# Altium PCB SensorModulePCB.PcbDoc
Units mm, origin at the board's own origin, x right, y up, seen from the top; angles counter-clockwise.
Board outline 25 x 25 mm, 2 copper layers (Top Layer, Bottom Layer); 29 components, 18 nets, 76 pads, 42 vias.
Unrouted connection lines stored in the file: 58.
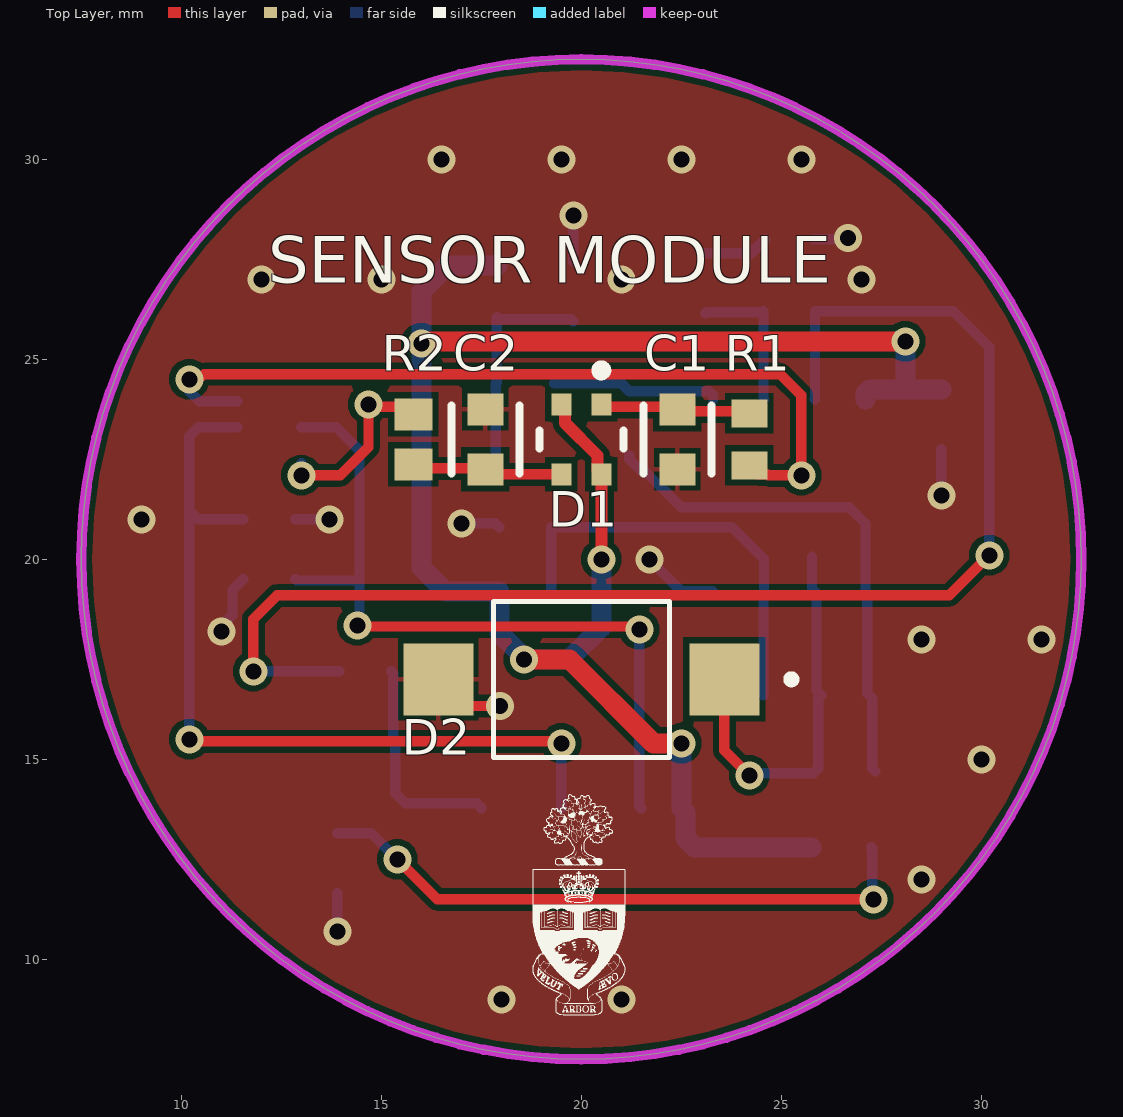
[diagram p0: Top Layer view]
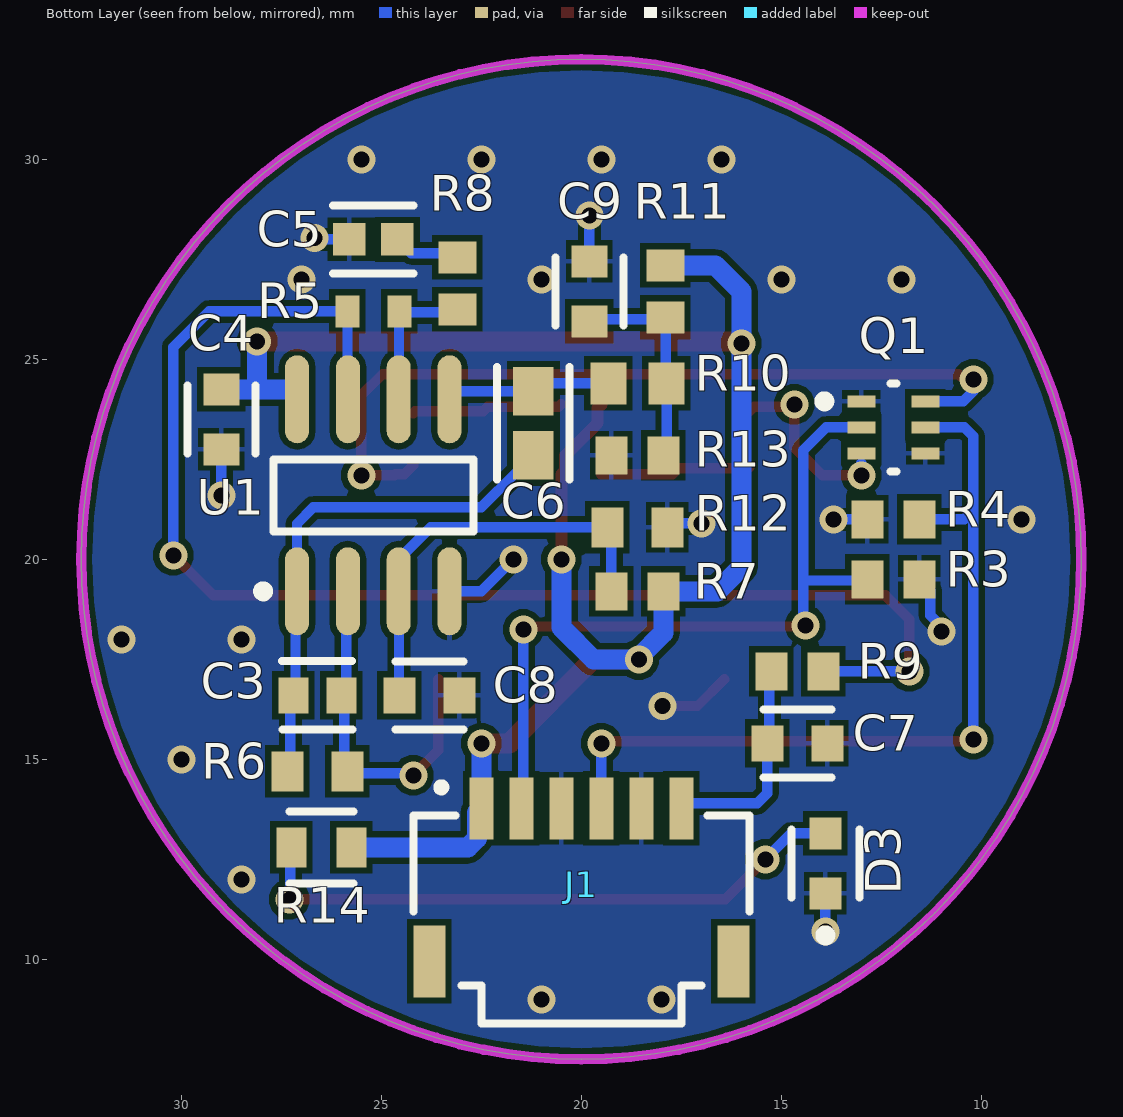
[diagram p1: Bottom Layer view, seen from below]
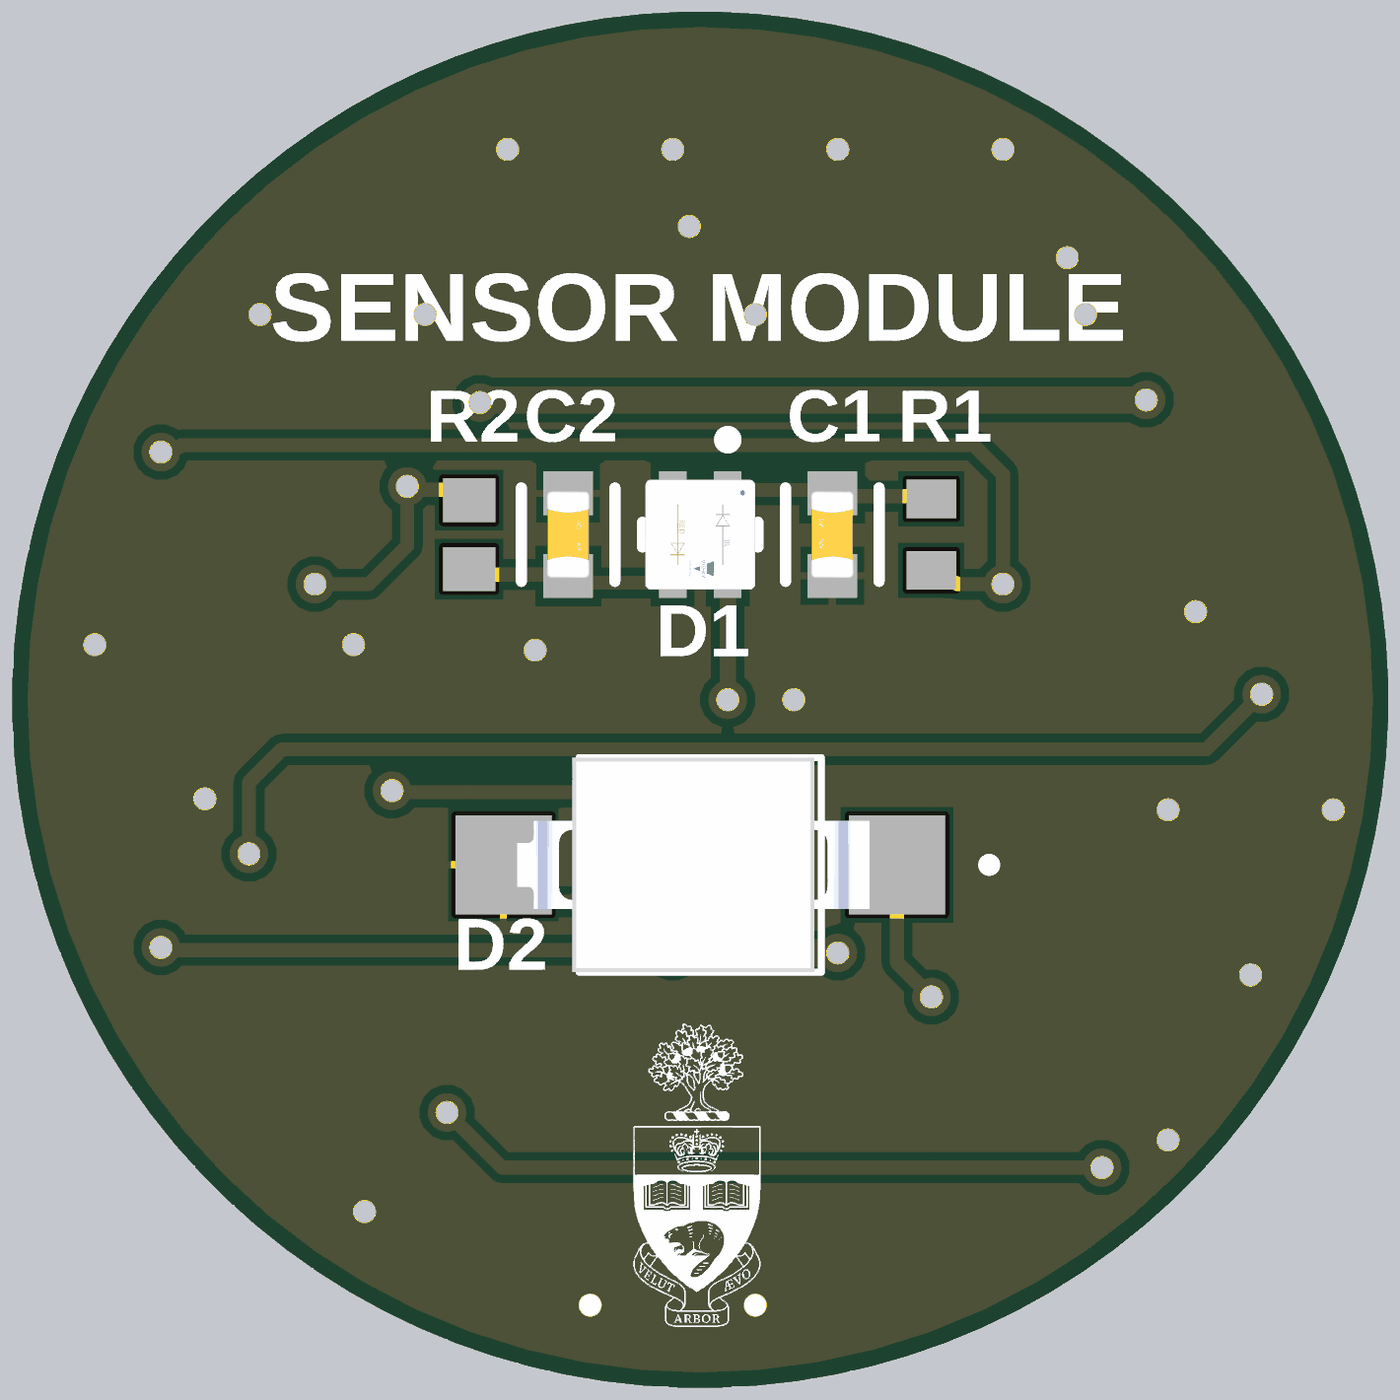
[diagram p2: 3D render of the assembled board from above, using the file's embedded part models]
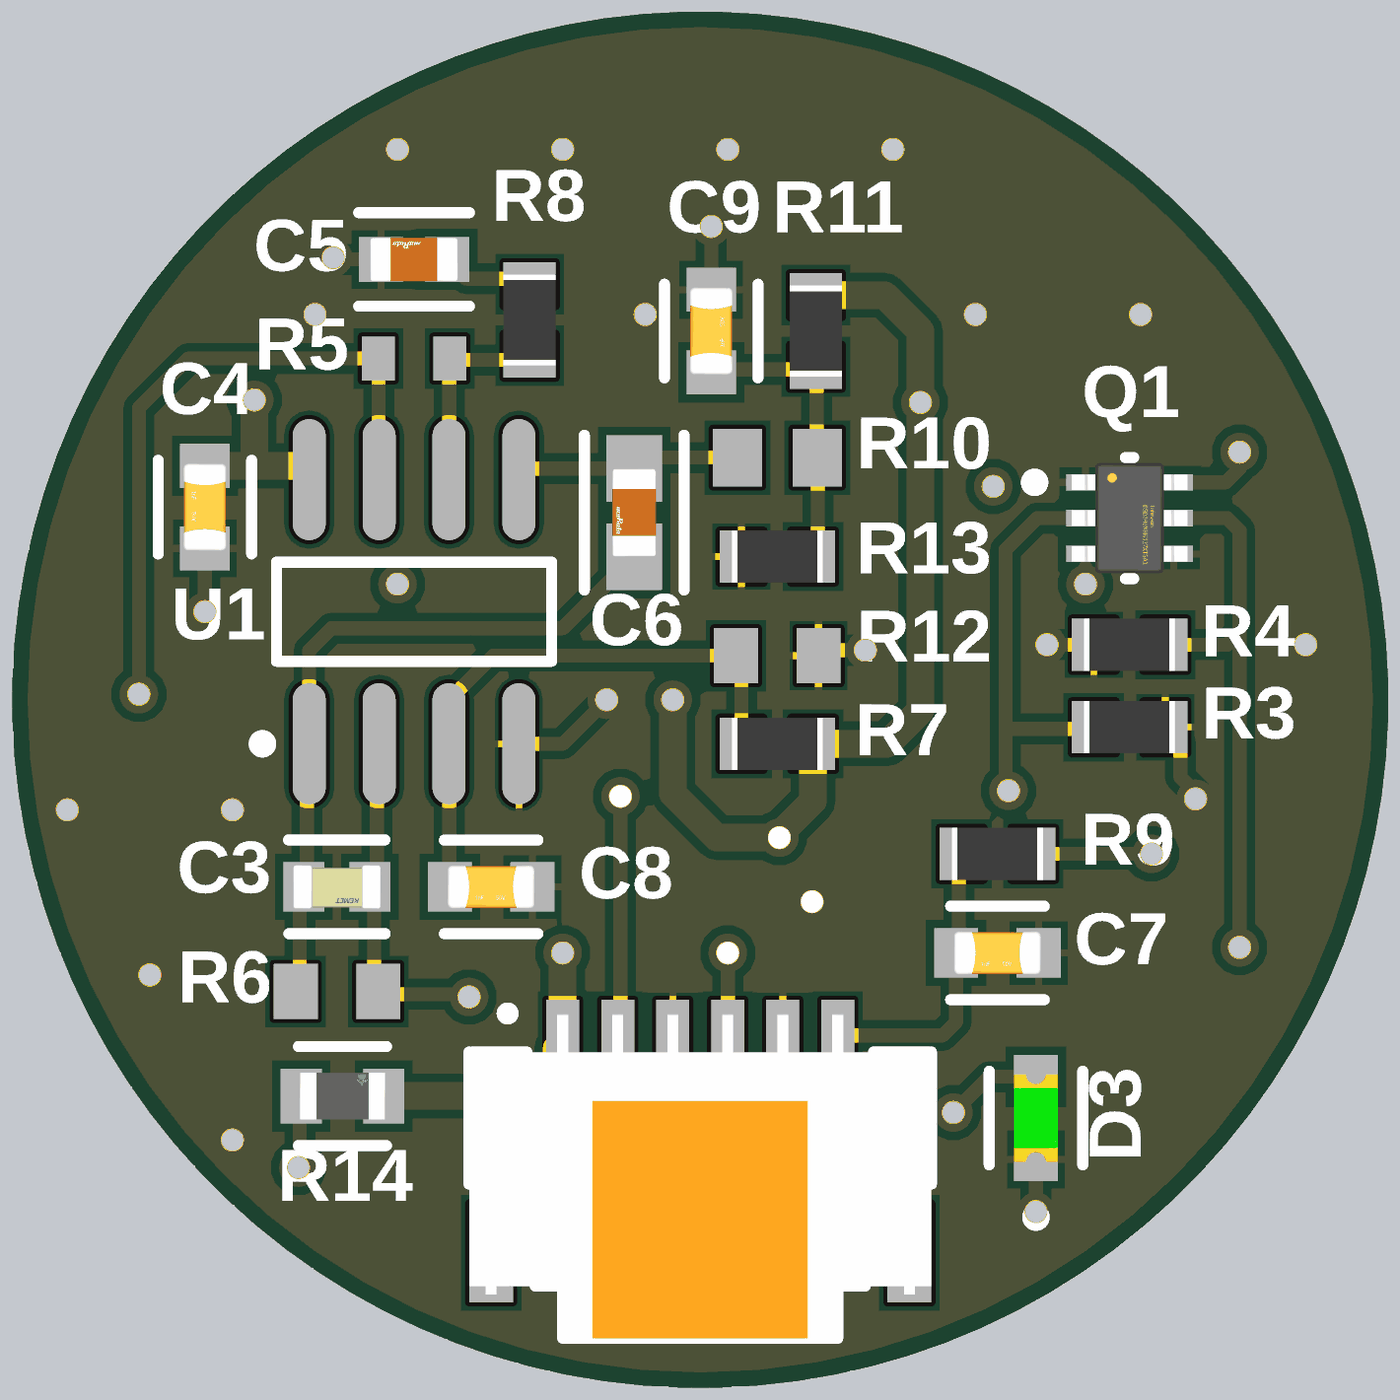
[diagram p3: 3D render of the assembled board from below, using the file's embedded part models]

## Layer stack, top to bottom
Top Solder: solder mask 0.0102, Solder Resist, Dk 3.5
Top Layer: signal copper 0.0356
Dielectric 1: dielectric 0.32, FR-4, Dk 4.8
Bottom Layer: signal copper 0.0356
Bottom Solder: solder mask 0.0102, Solder Resist, Dk 3.5

## Board outline
20,7.5 cw(c20,20) 7.5,20 cw(c20,20) 20,32.5 cw(c20,20) 32.5,20 cw(c20,20)

## Design rules (kind name [scope] priority, off if disabled: settings)
BoardOutlineClearance [All] p1: gap=0.2 ignorepadtopadclearanceinfootprint=FALSE
Clearance [All] p1: gap=0.15 ignorepadtopadclearanceinfootprint=FALSE except(0.127: Arc-Text Track-Text SMDPad-Text THPad-Text Via-Text Fill-Text Poly-Text Region-Text Text-Text; 0.25: Arc-Hole Track-Hole SMDPad-Hole THPad-Hole Via-Hole Fill-Hole Poly-Hole Region-Hole Text-Hole; 0.275: Arc-Via Track-Via SMDPad-Via THPad-Via Via-Via; 0.33: Arc-THPad Track-THPad)
ComponentClearance [All] p1: gap=0.127 collisioncheckmode=3 verticalgap=0.127 showdistances=TRUE
DiffPairsRouting [All] p1: maxlimit=0.254 minlimit=0.127 mostfreqgap=0.127 toplayer_minwidth=0.127 toplayer_maxwidth=25.4 toplayer_prefwidth=0.127 bottomlayer_minwidth=0.127 bottomlayer_maxwidth=25.4 bottomlayer_prefwidth=0.127 maxuncoupledlength=12.7
Height [All] p1: minheight=0 maxheight=1816.048 prefheight=12.7
HoleSize [All] p1: absolutevalues=TRUE maxlimit=6.3 minlimit=0.3 maxpercent=80.000 minpercent=20.000
HoleToHoleClearance [All] p1: gap=0.3 allowstackedmicrovias=FALSE
MinimumAnnularRing [All] p1: minimumring=0.076
MinimumSolderMaskSliver [All] p1: minsoldermaskwidth=0
PlaneClearance [All] p1: clearance=0.127
PlaneConnect PlaneConnectPowerPads [InPadClass('PowerPads')] p1: planeconnectstyle=Direct reliefexpansion=0.508 reliefentries=4 reliefconductorwidth=0.254 reliefairgap=0.254
PlaneConnect [All] p2: pad.planeconnectstyle=Relief pad.reliefexpansion=0.3 pad.reliefentries=4 pad.reliefconductorwidth=0.127 pad.reliefairgap=0.127 via.planeconnectstyle=Direct via.reliefexpansion=0.3 via.reliefentries=4 via.reliefconductorwidth=0.127 via.reliefairgap=0.127
PolygonConnect PolygonConnectPowerPads [All vs (InPadClass('PowerPads'))] p1: connectstyle=Direct reliefconductorwidth=0.254 reliefentries=4 polygonreliefangle="90 Angle" airgapwidth=0.254
PolygonConnect [All] p2: thpad.connectstyle=Relief thpad.reliefconductorwidth=0.127 thpad.reliefentries=4 thpad.polygonreliefangle="90 Angle" thpad.airgapwidth=0.127 smdpad.connectstyle=Relief smdpad.reliefconductorwidth=0.127 smdpad.reliefentries=4 smdpad.polygonreliefangle="90 Angle" smdpad.airgapwidth=0.127 via.connectstyle=Direct via.reliefconductorwidth=0.127 via.reliefentries=4 via.polygonreliefangle="90 Angle" via.airgapwidth=0.127
RoutingVias [All] p1: holewidth=0.3 width=0.6 viastyle="Through Hole" minholewidth=0.3 minwidth=0.6 maxholewidth=0.6 maxwidth=6.6
SilkToSilkClearance [All] p1: silktosilkclearance=0
SilkToSolderMaskClearance [IsPad] p1: minsilkscreentomaskgap=0.127 clearancetoexposedcopper=TRUE
SolderMaskExpansion [All] p1: expansion=0.075 istentingtop=FALSE
SupplyNets "Schematic Supply Nets_1" [InNet('3V3')] p1: voltage=0.000
SupplyNets "Schematic Supply Nets" [InNet('GND')] p2: voltage=0.000
Width [All] p1: maxlimit=25.4 minlimit=0.127 preferedwidth=0.127 minimp=50.000000 maximp=50.000000 favimp=50.000000
20 further rules are at their usual default settings.

## Classes and differential pairs
component class U_Emitter: C1 C2 D1 Q1 R1 R2 R3 R4
component class U_Detector: C3 C4 C5 C6 C7 C8 C9 D2 R5 R6 R7 R8 R9 R10 R11 R12 R13 U1
component class Top: D3 J1 R14

## Components (designator, comment, footprint, x,y, rotation, side; value= is the part's Value field where it differs from the comment)
C1 "CC0603KRX7R7BB104" FP-CC0603-DA-MFG 22.4,23 r270 top value="100 nF"
C2 "CC0603KRX7R7BB104" FP-CC0603-DA-MFG 17.6,23 r90 top value="100 nF"
C3 "C0603C201J5GACTU" FP-C0603C-CF-MFG 26.6,16.6 r0 bottom value="200 pF"
C4 "CC0603KRX7R7BB104" FP-CC0603-DA-MFG 29,23.5 r270 bottom value="100 nF"
C5 "GRM188R60J106ME47D" FP-GRM188-0_1-e0_2_0_55-IPC_C 25.2,28 r0 bottom value=10uF
C6 "GRM188R60J106ME47D" FP-GRM188-0_1-e0_2_0_55-IPC_A 21.2,23.4 r270 bottom value=10uF
C7 "CC0603KRX7R7BB104" FP-CC0603-DA-MFG 14.6,15.4 r180 bottom value="100 nF"
C8 "CC0603KRX7R7BB104" FP-CC0603-DA-MFG 23.8,16.6 r180 bottom value="100 nF"
C9 "CC0603KRX7R7BB104" FP-CC0603-DA-MFG 19.8,26.7 r90 bottom value="100 nF"
D1 "VSMD66694" FP-6_550-5347_01-4-MFG 20,23 r270 top
D2 "VBPW34S" XDCR_VBPW34S 20,17 r180 top
D3 "LTST-C190GKT" FP-LTST-C190GKT-MFG 13.9,12.4 r90 bottom
J1 "T1M-06-X-SH-L" SAMTEC_T1M-06-X-SH-L 20,13.6 r180 bottom
Q1 "BSD840NH6327XTSA1" FP-PG-SOT363-6-MFG 12.2,23.3 r180 bottom
R1 "RK73H1JTTD38R3F" RESC1608X55X30LL20T10 24.2,23 r90 top
R2 "CRCW0603200RJNEA" RESC1609X50X30NL10T20 15.8,23 r270 top
R3 "CRCW060310K0FKEA" RESC1609X50X30NL8T20 12.2,19.5 r0 bottom
R4 "CRCW060310K0FKEA" RESC1609X50X30NL8T20 12.2,21 r180 bottom
R5 "RC0603FR-071ML" RESC1608X55X25LL10T15 25.2,26.2 r180 bottom
R6 "RC0603FR-0760K4L" RESC1608X55X25ML10T15 26.6,14.7 r0 bottom value=60.4k
R7 "CRCW060310K0FKEA" RESC1609X50X30NL8T20 18.6,19.2 r180 bottom value=10kR
R8 "CRCW060310K0FKEA" RESC1609X50X30NL8T20 23.1,26.9 r270 bottom value=10kR
R9 "CRCW060310K0FKEA" RESC1609X50X30NL8T20 14.6,17.2 r180 bottom value=10kR
R10 "ERJ-3EKF1003V" RESC1608X55X30ML15T15 18.6,24.4 r0 bottom value=100kR
R11 "CRCW060310K0FKEA" RESC1609X50X30NL8T20 17.9,26.7 r90 bottom value=10kR
R12 "RC0603JR-070RL" RESC1608X55X25ML10T15 18.6,20.8 r0 bottom
R13 "CRCW060310K0FKEA" RESC1609X50X30NL8T20 18.6,22.6 r180 bottom value=10kR
R14 "CRCW0603200RFKEA" FP-CRCW0603-e3-MFG 26.5,12.8 r180 bottom
U1 "AD8616ARZ-REEL" ADI-R-8_N 25.2,21.6 r90 bottom

## Footprints (in the part's own frame and the unit in brackets; to place one, negate y for a bottom-side part, rotate by r counter-clockwise, add the part's x,y. Pads: shape width x height; smd on the part's side, far side on the other; paste and mask are expansions set on the pad)
ADI-R-8_N [mm] "SOIC, 8-Leads, Body 4.9x3.9mm, Pitch 1.27mm, IPC Medium Density"
  oval 2.2x0.6 smd: 1(-2.4,1.905) 2(-2.4,0.635) 3(-2.4,-0.635) 4(-2.4,-1.905) 5(2.4,-1.905) 6(2.4,-0.635) 7(2.4,0.635) 8(2.4,1.905)
  silkscreen extent -2.52,-2.5 0.9,2.88, body extent -2,-2.5 2,2.5, height 1.75
FP-6_550-5347_01-4-MFG [mm]
  rect 0.55x0.5 smd paste+0 mask+0: 1(-0.875,0.5) 2(-0.875,-0.5) 3(0.875,-0.5) 4(0.875,0.5)
  silkscreen extent -1.85,-1.05 0.22,1.05, body extent -1.25,-1.15 1.25,1.15, height 0.25
FP-C0603C-CF-MFG [mm]
  rect 0.75x0.9 smd paste+0 mask+0: 1(-0.6,0) 2(0.6,0)
  silkscreen extent -0.87,-0.85 0.88,0.85, body extent -0.8,-0.4 0.8,0.4, height 0.87
FP-CC0603-DA-MFG [mm]
  rect 0.8x0.9 smd paste+0 mask+0: 1(-0.75,0) 2(0.75,0)
  silkscreen extent -0.85,-0.85 0.85,0.85, body extent -0.8,-0.4 0.8,0.4, height 0.9
FP-CRCW0603-e3-MFG [mm]
  rect 0.75x1 smd paste+0 mask+0: 1(-0.75,0) 2(0.75,0)
  silkscreen extent -0.8,-0.9 0.8,0.9, body extent -0.77,-0.43 0.77,0.43, height 0.5
FP-GRM188-0_1-e0_2_0_55-IPC_A [mm]
  rect 1.208x1.012 smd paste+0 mask+0: 1(-0.802,0) 2(0.802,0)
  silkscreen extent -1.41,-0.91 1.41,0.91, body extent -0.8,-0.4 0.8,0.4, height 0.9
FP-GRM188-0_1-e0_2_0_55-IPC_C [mm]
  rect 0.808x0.812 smd paste+0 mask+0: 1(-0.602,0) 2(0.602,0)
  silkscreen extent -1.01,-0.85 1.01,0.85, body extent -0.8,-0.4 0.8,0.4, height 0.9
FP-LTST-C190GKT-MFG [mm]
  rect 0.8x0.8 smd paste+0 mask+0: 1(-0.75,0) 2(0.75,0)
  silkscreen extent -1.92,-0.85 0.85,0.85, body extent -0.8,-0.4 0.8,0.4, height 0.9
FP-PG-SOT363-6-MFG [mm]
  rect 0.7x0.3 smd paste+0 mask+0: 1(-0.8,0.65) 2(-0.8,0) 3(-0.8,-0.65) 4(0.8,-0.65) 5(0.8,0) 6(0.8,0.65)
  silkscreen extent -1.85,-1.1 0.08,1.1, body extent -1.05,-1 1.05,1, height 1.01
RESC1608X55X25LL10T15 [mm] "Chip Resistor, 2-Leads, Body 1.70x0.90mm, IPC High Density"
  rect 0.6x0.8 smd: 1(-0.65,0) 2(0.65,0)
  body extent -0.85,-0.45 0.85,0.45, height 0.55
RESC1608X55X25ML10T15 [mm] "Chip Resistor, 2-Leads, Body 1.60x0.80mm, IPC Low Density"
  rect 0.8x1 smd: 1(-0.75,0) 2(0.75,0)
  body extent -0.85,-0.45 0.85,0.45, height 0.55
RESC1608X55X30LL20T10 [mm] "Chip Resistor, 2-Leads, Body 1.60x0.80mm, IPC High Density"
  rect 0.7x0.9 smd: 1(-0.65,0) 2(0.65,0)
  body extent -0.9,-0.5 0.9,0.5, height 0.55
RESC1608X55X30ML15T15 [mm] "Chip Resistor, 2-Leads, Body 1.60x0.80mm, IPC Low Density"
  rect 0.9x1.05 smd: 1(-0.725,0) 2(0.725,0)
  body extent -0.87,-0.48 0.87,0.48, height 0.55
RESC1609X50X30NL8T20 [mm] "Chip Resistor, 2-Leads, Body 1.65x0.95mm, IPC Medium Density"
  rect 0.8x0.95 smd: 1(-0.65,0) 2(0.65,0)
  body extent -0.82,-0.48 0.82,0.48, height 0.5
RESC1609X50X30NL10T20 [mm] "Chip Resistor, 2-Leads, Body 1.55x0.85mm, IPC Medium Density"
  rect 0.8x0.95 smd: 1(-0.625,0) 2(0.625,0)
  body extent -0.82,-0.48 0.82,0.48, height 0.5
SAMTEC_T1M-06-X-SH-L [mm]
  rect 0.6x1.55 smd: 01(-2.5,0.175) 02(-1.5,0.175) 03(-0.5,0.175) 04(0.5,0.175) 05(1.5,0.175) 06(2.5,0.175)
  rect 0.8x1.8 smd: S1(-3.8,-3.65) S2(3.8,-3.65)
  silkscreen extent -4.2,-5.2 4.2,0.8, body extent -4.2,-5.21 4.2,0.69, height 4.72
XDCR_VBPW34S [mm]
  rect 1.75x1.8 smd: A(3.575,0) K(-3.575,0)
  silkscreen extent -5.35,-1.95 2.2,1.95, body extent -3.07,-1.95 3.33,1.95, height 1.4

## Part data
C1 C2 C4 C7 C8 C9: library part CMP-2000-05002-2, "CAP CER 0.1UF 16V X7R 0603", Capacitance="100 nF", Manufacturer=YAGEO, Package=CC0603-DA, Temperature="-55°C to +125°C", Temperature Characteristic=X7R, Temperature Coefficient=15%, Temperature Range High=+125°C, Temperature Range Low=-55°C, Tolerance=0.1, Voltage="16 V", Automotive=No, Category=Cap, ComponentLink2Description=Datasheet, ComponentLink2URL=http://www.yageo.com/documents/recent/UPY-GPHC_X7R_6.3V-to-50V_18.pdf, Device Class L1="Passive Components", Device Class L2=Capacitors, Device Class L3="Ceramic Capacitors", Digikey Description="CAP CER 0.1UF 16V X7R 0603", Footprint Url=http://www.yageo.com/exep/pages/download/literatures/UPY-C_GEN_24.pdf, Height=0.9mm, Lead Free=Yes, Manufacturer Part Number=CC0603KRX7R7BB104, Material=Ceramic, Mouser Description="Multilayer Ceramic Capacitor, CC Series, 0.1 - F, - 10%, X7R, 16 V, 0603 [1608 Metric]", Octopart=https://octopart.com/cc0603krx7r7bb104-yageo-192941, RoHS=TRUE, Voltage Rating="16 V"
C3: library part CMP-1035-01444-3, "CAP CER 200PF 50V 5% NP0 0603", Capacitance="200 pF", Manufacturer=KEMET, Package=C0603C-CF, Temperature="-55°C to +125°C", Temperature Characteristic=C0G, Temperature Coefficient=30ppm/°C, Temperature Range High=+125°C, Temperature Range Low=-55°C, Tolerance=0.05, Voltage Rating="50 V", Automotive=Yes, Automotive Grade="Grade 1", Category=Cap, ComponentLink2Description=Datasheet, ComponentLink2URL=https://api.kemet.com/component-edge/download/datasheet/C0603C100J5GACAUTO.pdf, Device Class L1="Passive Components", Device Class L2=Capacitors, Device Class L3="Ceramic Capacitors", Digikey Description="CAP CER 200PF 50V 5% NP0 0603", Height=0.87mm, Lead Free=Yes, Manufacturer Part Number=C0603C201J5GACTU, Material=Ceramic, Mouser Description="Multilayer Ceramic Capacitors MLCC - SMD/SMT 50volts 200pF C0G 5%", Octopart=https://octopart.com/c0603c201j5gactu-kemet-9143917, RoHS=TRUE
C5 C6: library part CMP-2006-02792-2, "Chip Multilayer Ceramic Capacitors for General Purpose, 0603, 10uF, X5R, 15%, 20%, 6.3V", Capacitance=10uF, Case Code (Imperial)=0603, Case Code (Metric)=1608, Dielectric=X5R, Max Operating Temperature=85°C, Min Operating Temperature=-55°C, Package Quantity=4000, Tolerance=20%, Voltage=6.3V, Case/Package=0603, Depth=0.8mm, Height=0.8mm, Lead Free="Lead Free", Length=1.6mm, Material=Ceramic, Mount="Surface Mount", Packaging="Tape and Reel", Radiation Hardening=No, REACH SVHC="No SVHC", Termination=SMD/SMT, Thickness=0.035inch, Voltage Rating=6.3V, Voltage Rating (DC)=6.3V, Width=0.031inch
D1: library part CMP-02520-000014-1, "EMITTER DUAL 660/940NM SQURE PCB", Ambient Temperature Range High=+85°C, Ambient Temperature Range Low=-25°C, Colour=Red,IR, Forward Current=20mA, Forward Voltage=2/1.4V, Manufacturer="Vishay Semiconductor Opto Division", Max Junction Temp=+100°C, Package=6.550-5347.01-4, Power Dissipation=161/119mW, Reverse Voltage=5V, Temperature="-25°C to +85°C", Automotive=No, Category=Diode, ComponentLink2Description=Datasheet, ComponentLink2URL=https://www.vishay.com/docs/84324/vsmd66694.pdf, Device Class L1=Optoelectronics, Device Class L2=LEDs, Device Class L3=unset, Digikey Description="EMITTER DUAL 660/940NM SQURE PCB", Height=0.97mm, Lead Free=Yes, Led Orientation="Top View", Manufacturer Part Number=VSMD66694, Octopart=https://octopart.com/vsmd66694-vishay-74221794, Peak Emmision Wavelength=660/940nm, RoHS=TRUE, Temperature Range High=+85°C, Temperature Range Low=-25°C, Viewing Angle=120°
D2: "Photodiode 940nm 100ns 130Â° 2-SMD, Gull Wing", Package="SMD-2 Vishay", Availability=Unavailable, MF=Vishay, MP=VBPW34S, Price=None, SnapEDA_Link=https://www.snapeda.com/parts/VBPW34S/Vishay%20Semiconductor%20Opto%20Division/view-part/139260/?ref=snap
D3: library part CMP-22017-000005-2, "LED GREEN CLEAR CHIP SMD", Case Code (Imperial)=0603, Case Code (Metric)=1608, Color=Green, Forward Current=30mA, Forward Voltage=2.1V, Lens Color=Colorless, Max Operating Temperature=85°C, Min Operating Temperature=-55°C, Package Quantity=1, Power Dissipation=100mW, Reverse Voltage=5V, Test Current=10mA, Voltage=2V, Case/Package=0603, Depth=0.8mm, Dominant Wavelength=569nm, Height=0.8mm, Illumination Color=Green, Lead Free="Lead Free", Length=1.6mm, Lens Style=Clear, Lens Transparency=Clear, Luminous Intensity=6mcd, Mount="Surface Mount", Number of Elements=1, Number of LEDs=1, Number of Pins=2, Packaging="Tape and Reel", Power Rating=100mW, Radiation Hardening=No, Viewing Angle=130°, Wavelength=565nm, Width=0.8mm
J1: "Connector Header Surface Mount, Right Angle 6 position 0.039\" (1.00mm)", Package=None, Availability=Unavailable, MF=Samtec, MP=T1M-06-X-SH-L, Price=None
Q1: library part CMP-32901-000170-1, "MOSFET 2N-CH 20V 0.88A SOT363", Case/Package=SOT-363-6, Continuous Drain Current (ID)=880mA, Drain to Source Voltage (Vdss)=20V, Gate to Source Voltage (Vgs)=8V, Input Capacitance=78pF, Max Operating Temperature=150°C, Max Power Dissipation=500mW, Min Operating Temperature=-55°C, FET Type="2 N-Channel", Halogen Free="Halogen Free", Lead Free="Lead Free", Max Dual Supply Voltage=20V, Mount="Surface Mount", Number of Pins=6, Packaging="Tape and Reel", Rds On Max=400mR, Rise Time=2.2ns
R1: library part CMP-2000-01468-1, Manufacturer="KOA Speer", Resistance="38.3 Ohm", Part Number=RK73H1JTTD38R3F
R2: library part CMP-2000-03064-1, Manufacturer="Vishay Dale", Resistance=200R, Part Number=CRCW0603200RJNEA
R3 R4 R7 R8 R9 R11 R13: library part CMP-1666-00005-4, "Chip Resistor, 10 KOhm, +/- 1%, 100 mW, -55 to 155 degC, 0603 (1608 Metric), RoHS, Tape and Reel", Manufacturer="Vishay Semiconductor", Max Operating Temperature="155 degC", Min Operating Temperature="-55 degC", Package Quantity=5000, Resistance=10kR, Voltage Rating="75 V", ComponentLink1Description="Manufacturer URL", ComponentLink1URL=http://www.vishay.com/, ComponentLink2Description=Datasheet, ComponentLink2URL=https://datasheet.ciiva.com/11809/0900766b80d98afc-11809037.pdf, DatasheetVersion=06/2012, Height="0.45 mm", Length="1.55 mm", Mounting Technology="Surface Mount", PackageDescription="2-Pin Surface Mount Device, Body 1.575 x 0.85 mm", PackageReference=0603, Packaging="Tape and Reel", REACH SVHC=Unknown, RoHSCompliant=true
R5: library part CMP-1659-00056-1, "Chip Resistor, 1 MOhm, +/- 1%, 100 mW, -55 to 155 degC, 0603 (1608 Metric), RoHS, Tape and Reel", Case\Package=Radial, Max Operating Temperature="85 degC", Min Operating Temperature="-40 degC", Package Quantity=200, Resistance=1MR, Tolerance=20%, Voltage Rating="25 V", ComponentLink1Description="Manufacturer URL", ComponentLink1URL=http://www.yageo.com/, ComponentLink2Description=Datasheet, ComponentLink2URL=http://www.yageo.com/documents/recent/PYu-RC_Group_51_RoHS_L_04.pdf, DatasheetVersion="Rev. 4, 02/2016", Diameter="10 mm", Height="20 mm", Lead Pitch="5 mm", Length="20 mm", Mount="Through Hole", PackageDescription="2-Pin Surface Mount Device, Body 1.6 x 0.8 mm", PackageReference=0603, Packaging=Bulk, Radiation Hardening=No, REACH SVHC="No SVHC", RoHSCompliant=true, Voltage Rating (DC)="25 V", Width="0 inch"
R6: library part CMP-2000-04099-1, Manufacturer=Yageo, Resistance=60.4k, Part Number=RC0603FR-0760K4L
R10: library part CMP-2000-00182-1, Manufacturer=Panasonic, Resistance=100kR, Part Number=ERJ-3EKF1003V
R12: library part CMP-2100-03667-1, "Chip Resistor, 0 Ohm, +/- 5%, 0.1 W, -55 to 155 degC, 0603 (1608 Metric), RoHS, Tape and Reel", Case Code (Imperial)=0603, Case Code (Metric)=1608, Manufacturer=Yageo, Max Operating Temperature=155degC, Min Operating Temperature=-55degC, Package Description="2-Pin Surface Mount Device, Body 1.6 x 0.8 mm", Package Quantity=5000, Power Rating=100mW, Resistance=0mOhm, Temperature Coefficient=200ppm/degreesC, Tolerance=5%, Voltage Rating=50V, Case/Package=0603, Composition=ThickFilm, Contact Plating=Tin, Datasheet URL=http://www.yageo.com/NewPortal/yageodocoutput?fileName=/pdf/R-Chip/PYu-RC_Group_51_RoHS_L_5.pdf, Datasheet Version="Rev. 5, 10/2016", Depth=0.8mm, Height=0.45mm, Lead Free=LeadFree, Length=1.6mm, Manufacturer URL=http://www.yageo.com/, Military Standard=Not, Number of Pins=2, Package Reference=0603, Packaging=TapeandReel, Radiation Hardening=No, REACH SVHC=NoSVHC, RoHSCompliant=true, Termination=SMD/SMT, Voltage Rating (DC)=50V, Width=0.8mm
R14: library part CMP-2000-03062-2, "RES Thick Film, 200Ω, 1%, 0.1W, 100ppm/°C, 0603", Case Code (Imperial)=0603, Case Code (Metric)=1608, Max Operating Temperature=155°C, Min Operating Temperature=-55°C, Package Quantity=5000, Power Rating=100mW, Resistance=200R, Temperature Coefficient=100ppm/°C, Tolerance=1%, Voltage Rating=75V, Case/Package=0603, Composition="Thick Film", Contact Plating=Tin, Depth=0.85mm, Height=0.45mm, Lead Free="Lead Free", Length=1.55mm, Military Standard=Not, Number of Pins=2, Packaging="Tape and Reel", Termination=SMD/SMT, Voltage Rating (DC)=75V, Weight=7.1E-05oz, Width=0.85mm
U1: library part CMP-0384-00619-1, "Double Channel Wide Bandwidth Operational Amplifier, 24 MHz BW, 12 V/us SR, Industrial, 8-pin SOIC (R-8), Reel", Amplifiers Per Package=2, Generic Part Number=AD8616, Input Bias Current=200fA, Input Offset Voltage=23uV, Manufacturer="Analog Devices", Code_JEDEC=MS-012-AA, ComponentLink1Description="Manufacturer URL", ComponentLink1URL=http://www.analog.com/en/index.html, ComponentLink2Description=Datasheet, ComponentLink2URL=http://www.analog.com/static/imported-files/data_sheets/AD8615_8616_8618.pdf, ComponentLink3Description="Package Specification", ComponentLink3URL=http://www.analog.com/static/imported-files/packages/PKG_PDF/SOIC_Narrow%20(R)/R_8.pdf, DatasheetVersion="Rev. E", Iq/Amp=2mA, Mounting Technology="Surface Mount", PackageDescription="8-Pin Standard Small Outline Package, Body 3.9 x 4.9 mm, Pitch 1.27 mm", PackageReference=R-8, PackageVersion=060506-A, PartNumber=AD8616ARZ-REEL, Slew Rate=12V/us, Small Signal Bandwidth=24MHz, V Span Max=6V, V Span Min=2.7V

## Via types
v1: diameter 0.7, hole 0.4, Top Layer to Bottom Layer, tented both sides, 42 vias

## Nets (pads, with @x,y where several pads share a name; then routed paths per layer and width w, separated by ;. In a path a pad name is that pad's centre, name@x,y a point inside that pad or via, vN(x,y) a via of type N, cw(c..) or ccw(c..) an arc to the next point about the centre after c; other vN are vias at no path point)
3V3: C4.1 D1.2 D1.4 J1.01 R7.2 R11.2 R14.2 U1.8 | length 47.4
  Top Layer w0.3: D1.2 19.59,23.785 19.59,23.41 20.41,22.59 20.41,22.215 D1.4 v1(20.5,20)
  Top Layer w0.5: v1(16,25.4) 16.038,25.438 16.18,25.438 16.187,25.446 v1@28.101,25.446 ; v1(18.563,17.494) 19.707,17.494 21.801,15.4 v1(22.5,15.4)
  Bottom Layer w0.5: R11.2 16.65,27.35 16,26.7 16,19.8 16.6,19.2 R7.2 17.95,18.161 18.563,17.548 v1(18.563,17.494) 19.694,17.494 20.5,18.3 v1(20.5,20) ; v1(22.5,15.4) J1.01 22.61,13.666 22.61,13.023 22.833,12.8 R14.2 ; U1.8 27.105,24.149 27.206,24.25 28.103,24.25 ; v1(28.103,25.448) 28.103,24.25 ; C4.1 28.103,24.25
660_NM_LED_GATE: J1.04 Q1.5 R4.2 | length 21.3
  Top Layer w0.254: v1(10.2,15.5) 10.25,15.45 19.45,15.45 v1(19.5,15.4)
  Bottom Layer w0.254: v1(10.2,15.5) 10.2,21.223 ; Q1.5 10.423,23.3 10.2,23.077 10.2,21.223 ; R4.2 10.423,21 10.2,21.223 ; J1.04 v1(19.5,15.4)
940NM_LED_GATE: J1.02 Q1.2 R3.2 | length 19.3
  Top Layer w0.254: v1(14.4,18.348) 14.425,18.323 21.373,18.323 v1(21.45,18.246)
  Bottom Layer w0.254: R3.2 12.878,19.472 14.452,19.472 ; Q1.2 13.877,23.3 14.452,22.725 14.452,19.472 ; v1(14.4,18.348) 14.452,18.4 14.452,19.472 ; v1(21.45,18.246) 21.45,13.825 J1.02
DETECTOR_OUTPUT: C7.1 J1.06 R9.1 | length 5.4
  Bottom Layer w0.254: R9.1 15.3,17.15 15.3,15.45 C7.1 15.35,14.15 15.6,13.9 17.391,13.9 17.5,13.791 J1.06
GND: C1.2 C2.2 C4.2 C5.2 C7.2 C8.2 C9.2 D2.A D3.1 J1.03 J1.05 Q1.1 Q1.4 R3.1 R4.1 R12.1 R13.1 U1.4 | length 11.3
  Top Layer w0.254: D2.A 17.094,16.331 v1(17.969,16.331)
  Bottom Layer w0.254: v1(11,18.2) 11,18.321 11.277,18.598 11.277,19.227 R3.1 ; R4.1 v1(13.7,21) ; v1(13.9,10.7) D3.1 ; v1(17,20.9) 17.85,20.9 R12.1@17.95,20.8 ; C9.2 v1(19.8,28.6) ; v1(21.7,20) 22.5,19.2 U1.4 ; C5.2 v1@26.7,28 ; v1(29,21.6) C4.2
  other v1: 18,9 21,9 28.5,12 30,15 28.5,18 31.5,18 9,21 12,27 15,27 21,27 27,27 26.669,28.031 16.5,30 19.5,30 22.5,30 25.5,30
NetC1_1: C1.1 D1.1 R1.2 | length 3.8
  Top Layer w0.254: D1.1 20.5,23.872 20.559,23.812 22.338,23.812 C1.1 22.45,23.7 24.15,23.7 R1.2
NetC2_1: C2.1 D1.3 R2.2 | length 3.8
  Top Layer w0.254: R2.2@15.8,22.3 15.825,22.275 17.575,22.275 17.725,22.125 D1.3
NetC3_1: C3.1 D2.K R6.1 U1.2 | length 9.9
  Top Layer w0.254: D2.K 23.575,15.225 v1(24.2,14.6)
  Bottom Layer w0.254: v1(24.2,14.6) 24.25,14.65 25.8,14.65 R6.1 25.925,14.775 25.925,16.525 C3.1 25.877,16.723 25.877,19.158 25.763,19.272 U1.2@25.763,20.072
NetC3_2: C3.2 C6.2 R6.2 U1.1 | length 13
  Bottom Layer w0.254: C6.2 21.2,22.5 21.516,22.184 21.614,22.184 22.498,21.3 26.7,21.3 27.105,20.895 U1.1 27.147,19.158 27.147,16.653 C3.2 27.275,16.525 27.275,14.775 R6.2
NetC5_1: C5.1 R8.1 | length 1.6
  Bottom Layer w0.254: R8.1@23.1,27.65 24.25,27.65 24.598,27.998 C5.1
NetC6_1: C6.1 R10.2 U1.5 | length 4.2
  Bottom Layer w0.254: R10.2 21.002,24.4 C6.1 23.194,24.202 23.295,24.101 U1.5
NetC8_1: C8.1 R7.1 R12.2 U1.3 | length 10.7
  Bottom Layer w0.254: R7.1 19.25,20.8 23.765,20.8 24.565,20 U1.3 24.557,19.192 24.557,16.607 C8.1
NetC9_1: C9.1 R10.1 R11.1 R13.2 | length 5.4
  Bottom Layer w0.254: R13.2@17.85,22.6 17.863,22.612 17.863,24.388 R10.1 17.888,24.412 17.888,26.037 R11.1 17.95,26 19.75,26 C9.1
NetD3_2: D3.2 R14.1 | length 15.4
  Top Layer w0.254: v1(15.4,12.5) 16.4,11.5 v1(27.3,11.5)
  Bottom Layer w0.254: D3.2 14.75,13.15 v1(15.4,12.5) ; R14.1 27.275,12.775 27.275,11.525 v1(27.3,11.5)
NetQ1_3: Q1.3 R2.1 | length 4.5
  Top Layer w0.254: v1(13,22.1) 13.977,22.1 14.677,22.8 v1(14.677,23.877) 14.738,23.816 15.684,23.816 R2.1@15.8,23.7
  Bottom Layer w0.254: v1(13,22.1) v1@13,22.4
NetQ1_6: Q1.6 R1.1 | length 20.6
  Top Layer w0.254: v1(10.2,24.5) 10.285,24.585 10.528,24.585 10.572,24.629 24.971,24.629 25.5,24.1 v1(25.5,22.1) 24.672,22.1 24.645,22.127 24.423,22.127 R1.1
  Bottom Layer w0.254: v1(10.2,24.5) 10.2,24.2 10.45,23.95 Q1.6
NetR5_1: R5.1 R9.2 U1.7 | length 34.6
  Top Layer w0.254: v1(11.8,17.2) 11.8,18.5 12.4,19.1 29.2,19.1 v1(30.2,20.1)
  Bottom Layer w0.254: v1(11.8,17.2) R9.2 ; U1.7 25.843,24.008 25.843,26.193 R5.1 29.3,26.2 30.2,25.3 v1(30.2,20.1)
NetR5_2: R5.2 R8.2 U1.6 | length 3.7
  Bottom Layer w0.254: R8.2@23.1,26.15 23.125,26.175 24.525,26.175 R5.2 24.557,26.193 24.557,24.008 U1.6
pads on no net: J1.S1 J1.S2

## Polygon pours and split planes (outlines as drawn)
GND on Bottom Layer "GND_L02_P001" (solid, pour order 1): 5.4,33.4 5.5,33.3 34.7,33.3 34.7,6.7 34.6,6.8 5.4,6.8
GND on Top Layer "GND_L01_P000" (solid, pour order 0): 5.4,33.4 5.5,33.3 34.7,33.3 34.7,6.7 34.6,6.8 5.4,6.8

## Keep-outs
Keep-Out Layer:
  circle w0.254: c20,20 r12.5

## Silkscreen, mask and mechanical layers (free items; w line width, h text height)
Top Overlay:
  drawing of 93 lines, arcs and shapes, not listed
  text "SENSOR MODULE" at 12.179,26.523 h2